# EAGLE board pearwatch2 (EAGLE 9.5.2)

Size 38 x 38 mm. Coordinates in mm from the lower left corner, seen from the top.
Outline: 0,0 38,0 38,38 0,38 0,0
Copper layers (1*16): Top 0.035mm / dielectric 1.5mm / Bottom 0.035mm
Design rules "default": minimum track width 6mil, minimum drill 0.35mm, track to track 6mil, track to pad 6mil, pad to pad 6mil, via to via 6mil, smd to smd 6mil, copper to edge 40mil, drill to drill 6mil, minimum pad ring 10mil, minimum via ring 8mil, stop-mask expansion 4mil, vias tented up to drill 0mil, thermal gap 10mil

## Footprints (pad centres in the part's own frame; a part is rotated, then mirrored left to right if it is on the bottom)
C0603 = smd 1.1 x 1: 1 -0.85,0; 2 0.85,0
C0805 = smd 1.3 x 1.5: 1 -0.95,0; 2 0.95,0
C0402 = smd 0.7 x 0.9: 1 -0.65,0; 2 0.65,0
SOT23-5 = smd 0.55 x 1.2: 1 -0.95,-1.3; 2 0,-1.3; 3 0.95,-1.3; 4 0.95,1.3; 5 -0.95,1.3
2X5-PTH-1.27MM = drill 0.508 pad 1: 1 -2.54,-0.635; 2 -2.54,0.635; 3 -1.27,-0.635; 4 -1.27,0.635; 5 0,-0.635; 6 0,0.635; 7 1.27,-0.635; 8 1.27,0.635; 9 2.54,-0.635; 10 2.54,0.635
USC = smd 0.8 x 0.6: + -1.15,0; - 1.15,0
1X02 = drill 1.016 pad 1.88: 1 0,0; 2 2.54,0
L0603 = smd 1 x 1.1: 1 -0.85,0; 2 0.85,0
LED-0603 = smd 1 x 1: A -0.877,0; C 0.877,0
R0603 = smd 1 x 1.1: 1 -0.85,0; 2 0.85,0
MICROSD = smd 0.7 x 1.5: 1 9,-10.64; 2 7.9,-10.24; 3 6.8,-10.64; 4 5.7,-11.04; 5 4.6,-10.64; 6 3.5,-11.04; 7 2.4,-10.64; 8 1.3,-10.64 | smd 1.8 x 1.4: CD1 2,-0.44; CD2 8,-0.44 | smd 1.4 x 1.9: MT1 0.4,-13.54; MT2 13.6,-14.44
BUTTON-GULLWING = smd 0.7 x 0.75: 1 -1.6,0.825; 2 1.6,0.825; 3 -1.6,-0.825; 4 1.6,-0.825
BLE_MODULE_RAYTAC_MDBT42 = smd 1.6 x 0.9: 1 -4.6,3.8; 39 4.6,3.8 | smd 1.6 x 0.48: 2 -4.6,0.8; 3 -4.6,0.1; 4 -4.6,-0.6; 5 -4.6,-1.3; 6 -4.6,-2; 7 -4.6,-2.7; 8 -4.6,-3.4; 9 -4.6,-4.1; 10 -4.6,-4.8; 11 -4.6,-5.5; 25 4.6,-6.2; 26 4.6,-5.5; 27 4.6,-4.8; 28 4.6,-4.1; 29 4.6,-3.4; 30 4.6,-2.7; 31 4.6,-2; 32 4.6,-1.3; 33 4.6,-0.6; 34 4.6,0.1; 35 4.6,0.8; 36 4.6,1.5; 37 4.6,2.2; 38 4.6,2.9 | smd 0.48 x 1.6: 12 -4.2,-7.65; 13 -3.5,-7.65; 14 -2.8,-7.65; 15 -2.1,-7.65; 16 -1.4,-7.65; 17 -0.7,-7.65; 18 0,-7.65; 19 0.7,-7.65; 20 1.4,-7.65; 21 2.1,-7.65; 22 2.8,-7.65; 23 3.5,-7.65; 24 4.2,-7.65 | smd 1.2 x 0.5: 40 2.9,3.25; 41 2.9,1.85
UG-2864HSWEG01_0.96IN_NO-WRAPAROUND = smd 0.35 x 2.2: 1 -10.15,-1.2; 2 -9.45,-1.2; 3 -8.75,-1.2; 4 -8.05,-1.2; 5 -7.35,-1.2; 6 -6.65,-1.2; 7 -5.95,-1.2; 8 -5.25,-1.2; 9 -4.55,-1.2; 10 -3.85,-1.2; 11 -3.15,-1.2; 12 -2.45,-1.2; 13 -1.75,-1.2; 14 -1.05,-1.2; 15 -0.35,-1.2; 16 0.35,-1.2; 17 1.05,-1.2; 18 1.75,-1.2; 19 2.45,-1.2; 20 3.15,-1.2; 21 3.85,-1.2; 22 4.55,-1.2; 23 5.25,-1.2; 24 5.95,-1.2; 25 6.65,-1.2; 26 7.35,-1.2; 27 8.05,-1.2; 28 8.75,-1.2; 29 9.45,-1.2; 30 10.15,-1.2
SO8 = smd 1.3 x 0.6: 1 -2.65,1.905; 2 -2.65,0.635; 3 -2.65,-0.635; 4 -2.65,-1.905; 5 2.65,-1.905; 6 2.65,-0.635; 7 2.65,0.635; 8 2.65,1.905
USB-MICRO-01.BIGGERPADS = smd 0.4 x 1.7: 1 -1.3,1.505; 2 -0.65,1.505; 3 0,1.505; 4 0.65,1.505; 5 1.3,1.505 | smd 1.9 x 1.9: S1 -3.85,-1.27; S2 -1.2,-1.27; S3 1.2,-1.27; S4 3.85,-1.27 | smd 2.1 x 1.6: S5 -3.1,1.28; S6 3.1,1.28
2-SMD.NOLEAD.2.0MMTO1.2MM = smd 0.7 x 1.3: P$1 -0.8,0; P$2 0.8,0

## Placement (x,y rotation side)
C2  1u  [C0603]  10.31,30.96 180 top
C5  1u  [C0603]  14.17,3.38 90 top
C6  1u  [C0603]  20.32,3.38 270 top
C7  1u  [C0603]  23.77,26.01 270 top
C8  [C0603]  25.55,16.1 0 top
C9  [C0603]  29.49,15.98 0 top
C10  300p  [C0603]  34.82,16.61 0 top
C11  300p  [C0603]  34.44,18.77 0 top
C12  10u  [C0805]  22.63,22.07 0 top
C13  2.2uF  [C0402]  9.4,24.41 90 top
C14  100n  [C0603]  49.56,19.28 270 top  (outside the outline)
C15  2.2uF  [C0402]  10.79,24.54 90 top
C16  10uF  [C0603]  27.76,25.15 270 top
C17  2.2uF  [C0402]  13.46,24.49 270 top
C18  2.2uF  [C0402]  26.16,24.79 90 top
C19  2.2uF  [C0402]  12.14,24.51 270 top
C20  4.7u  [C0603]  14.86,10.36 90 top
C21  4.7u  [C0603]  20.88,10.29 270 top
CHRG2  MCP73831  [SOT23-5]  17.75,10.36 270 top
CORTEX1  CORTEX_DEBUG_PTH  [2X5-PTH-1.27MM]  40.92,31.34 180 top
D1  [USC]  47.02,19.41 90 top  (outside the outline)
D4  [USC]  9.35,4.42 0 top
D5  [USC]  9.32,2.34 0 top
J2  [1X02]  1.96,16.36 270 top
L2  10u  [L0603]  21.74,26.26 90 top
LDO2  MIC5504  [SOT23-5]  17.25,3.28 270 top
LED3  RED  [LED-0603]  42.57,25.37 0 top  (outside the outline)
LED4  BLUE  [LED-0603]  42.82,27.66 0 top  (outside the outline)
R3  1k  [R0603]  38.76,25.63 180 top
R4  1k  [R0603]  39.27,27.66 180 top
R5  10k  [R0603]  44.6,19.53 90 top  (outside the outline)
R6  10k  [R0603]  6.02,12.65 0 top
R7  390k  [R0603]  6.02,9.96 0 top
R8  10k  [R0603]  13.59,27.58 90 top
R9  10k  [R0603]  15.88,26.34 90 top
R11  [R0603]  19.86,12.95 180 top
R12  100k  [R0603]  17.78,7.44 0 top
R13  100k  [R0603]  10.34,13.21 90 top
R14  100k  [R0603]  10.34,9.93 90 top
R15  100k  [R0603]  22.35,3.43 90 top
SD2  [MICROSD]  20.93,14.94 270 bottom
SW3  [BUTTON-GULLWING]  48.03,30.96 0 top  (outside the outline)
SW4  [BUTTON-GULLWING]  40.92,19.53 180 top
U2  NRF52832_MODULE_MDBT42  [BLE_MODULE_RAYTAC_MDBT42]  30.76,28.93 0 top
U3  [UG-2864HSWEG01_0.96IN_NO-WRAPAROUND]  18.11,21.92 0 top
U4  PCF8523  [SO8]  8.51,27.36 0 top
USB2  USB.MICRO-BIGGERPADS  [USB-MICRO-01.BIGGERPADS]  2.92,5.92 90 bottom
XTAL2  32.768kHz  [2-SMD.NOLEAD.2.0MMTO1.2MM]  27.58,17.88 0 top
XTAL3  32.7680kHz  [2-SMD.NOLEAD.2.0MMTO1.2MM]  3.94,28.83 90 top

## Library data of the parts
C2 C5-C21 L2 R3-R9 R11-R15 = LinnesLab-Passives
CHRG2 = LinnesLab-Power; PROD_ID: IC-09995
CORTEX1 J2 SD2 USB2 = LinnesLab-Connectors
D1 D4 D5 = LinnesLab-DiscreteSemi
LDO2 = LinnesLab-Power
LED3 LED4 = LinnesLab-LED
SW3 SW4 = LinnesLab-Switches
U2 = LinnesLab-Microcontrollers
U3 = LinnesLab-Displays
U4 = LinnesLab-Clocks; DIGIKEY: 568-5306-1-ND; I2C_ADDRESS: 0x68h; MFN: PCF8523T/1,118; MFN_MANUFACTURER: NXP USA Inc.
XTAL2 XTAL3 = LinnesLab-Clocks; DIGIKEY: XC2288CT-ND; FREQ: 32.7680KHZ; LOAD_CAP: 12.5pF

## Nets
3.3V: C2.1 C6.1 C12.2 C17.2 C19.2 CORTEX1.1 D1.- LDO2.5 R5.2 R8.2 R9.2 R15.2 SD2.4 U2.11 U3.6 U3.9 U4.8
BATT: R13.1 R14.2
CD1: SD2.CD1
CD2: SD2.CD2
CHRG.STAT: CHRG2.1 R12.1
CS.OLED: U3.13
DC.OLED: U3.15
DFU: SW3.3 U2.34
DTR: C14.1
FRST: U2.38
GND: C2.2 C5.1 C6.2 C7.2 C8.1 C9.2 C10.2 C11.2 C12.1 C16.1 C17.1 C18.1 C19.1 C20.2 C21.1 CHRG2.2 CORTEX1.3 CORTEX1.5 CORTEX1.7 CORTEX1.9 J2.1 LDO2.2 LED3.C LED4.C R6.1 R7.2 R11.1 R14.1 R15.1 SD2.6 SD2.MT1 SD2.MT2 SW3.1 SW4.3 U2.1 U2.12 U2.24 U2.39 U3.1 U3.8 U3.10 U3.12 U3.29 U3.30 U4.4 USB2.5
LED1: R3.2 U2.31
LED2: R4.2 U2.33
MISO: SD2.7 U2.28
MOSI: SD2.3 U2.27 U3.19
N$1: R6.2 U3.11
N$2: R7.1 U3.26
N$3: C13.2 U3.2
N$4: C8.2 U2.13 XTAL2.P$1
N$5: C13.1 U3.3
N$6: C9.1 U2.14 XTAL2.P$2
N$7: C15.2 U3.4
N$8: C15.1 U3.5
N$9: LED3.A R3.1
N$10: LED4.A R4.1
N$11: L2.1 U2.10
N$12: C7.1 L2.2 U2.9
N$13: C16.2 U3.28
N$14: CORTEX1.8
N$15: C18.2 U3.27
N$17: CHRG2.5 R11.2
N$19: U4.2 XTAL3.P$1
N$20: U4.1 XTAL3.P$2
P0.09/NFC1: C11.1 U2.22
P0.10/NFC2: C10.1 U2.23
RESET: C14.2 CORTEX1.10 D1.+ R5.1 SW4.1 U2.35
RESET.OLED: U3.14
RXD: U2.21
SCK: SD2.5 U2.26 U3.18
SCL: R8.1 U2.3 U4.6
SD.CS: SD2.2
SDA: R9.1 U2.2 U4.5
SWCLK: CORTEX1.4 U2.36
SWDIO: CORTEX1.2 U2.37
SWO: CORTEX1.6 U2.32
TXD: U2.19
USB+: USB2.3
USB-: USB2.2
V_USB: D5.+ USB2.1
VBATT: U4.3
VIN: C5.2 C21.2 CHRG2.4 D4.- D5.- LDO2.1 LDO2.3 R12.2
VLIPO: C20.1 CHRG2.3 D4.+ J2.2 R13.2

## Tracks (layer width: path | path; a pad name or v marks a point on that pad's centre or on a via)
3.3V  (15 unrouted)
BATT  (1 unrouted)
CHRG.STAT  (1 unrouted)
DFU  (1 unrouted)
GND  (44 unrouted)
LED1  (1 unrouted)
LED2  (1 unrouted)
MISO  (1 unrouted)
MOSI  (2 unrouted)
N$1  (1 unrouted)
N$2  (1 unrouted)
N$3  (1 unrouted)
N$4  (2 unrouted)
N$5  (1 unrouted)
N$6  (2 unrouted)
N$7  (1 unrouted)
N$8  (1 unrouted)
N$9  (1 unrouted)
N$10  (1 unrouted)
N$11  (1 unrouted)
N$12  (2 unrouted)
N$13  (1 unrouted)
N$15  (1 unrouted)
N$17  (1 unrouted)
N$19  (1 unrouted)
N$20  (1 unrouted)
P0.09/NFC1  (1 unrouted)
P0.10/NFC2  (1 unrouted)
RESET  (5 unrouted)
SCK  (2 unrouted)
SCL  (1 unrouted)
SDA  (1 unrouted)
SWCLK  (1 unrouted)
SWDIO  (1 unrouted)
SWO  (1 unrouted)
V_USB  (1 unrouted)
VIN  (7 unrouted)
VLIPO  (4 unrouted)